# Allegro board tida01606_powercard_0_0.brd
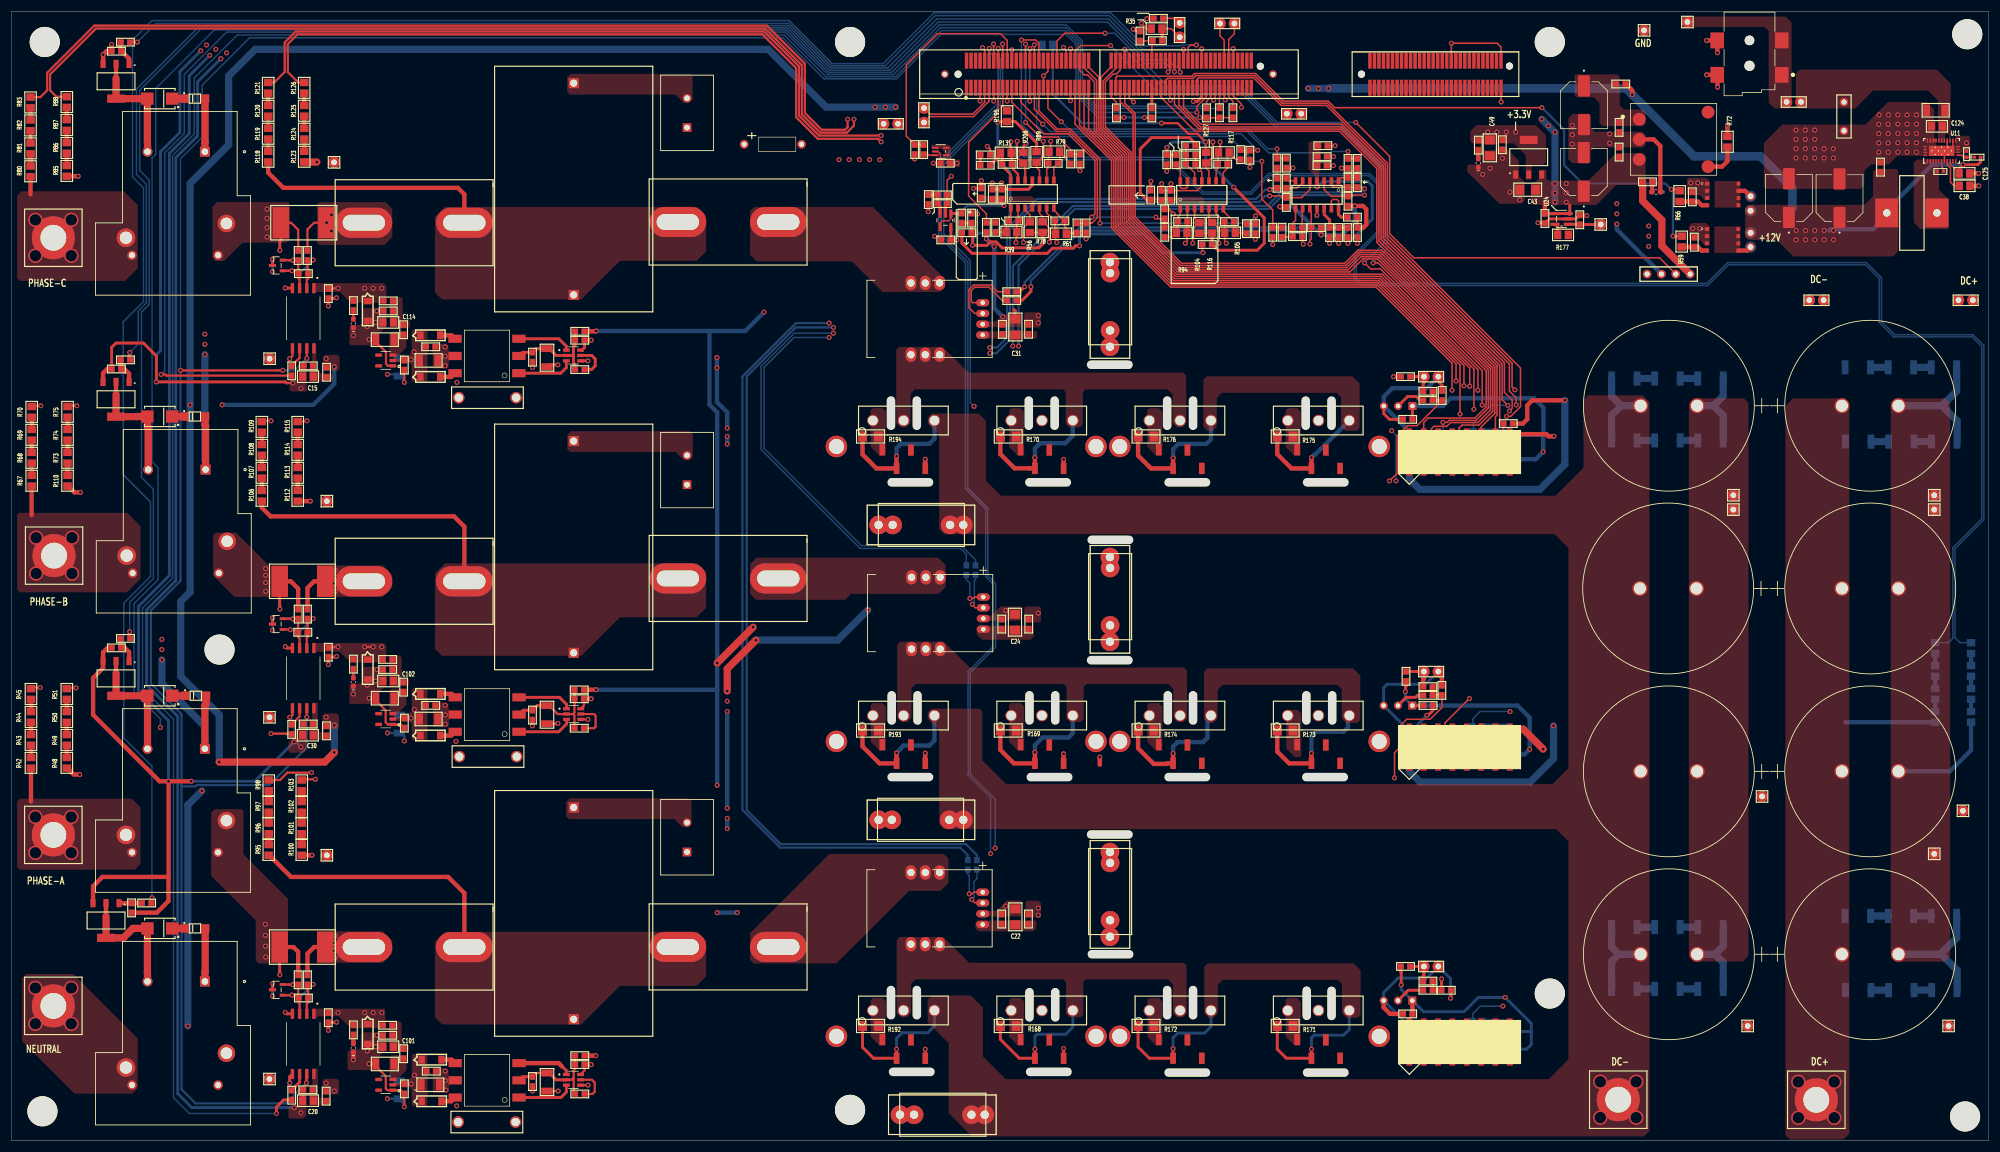
[diagram p0: board, top side]
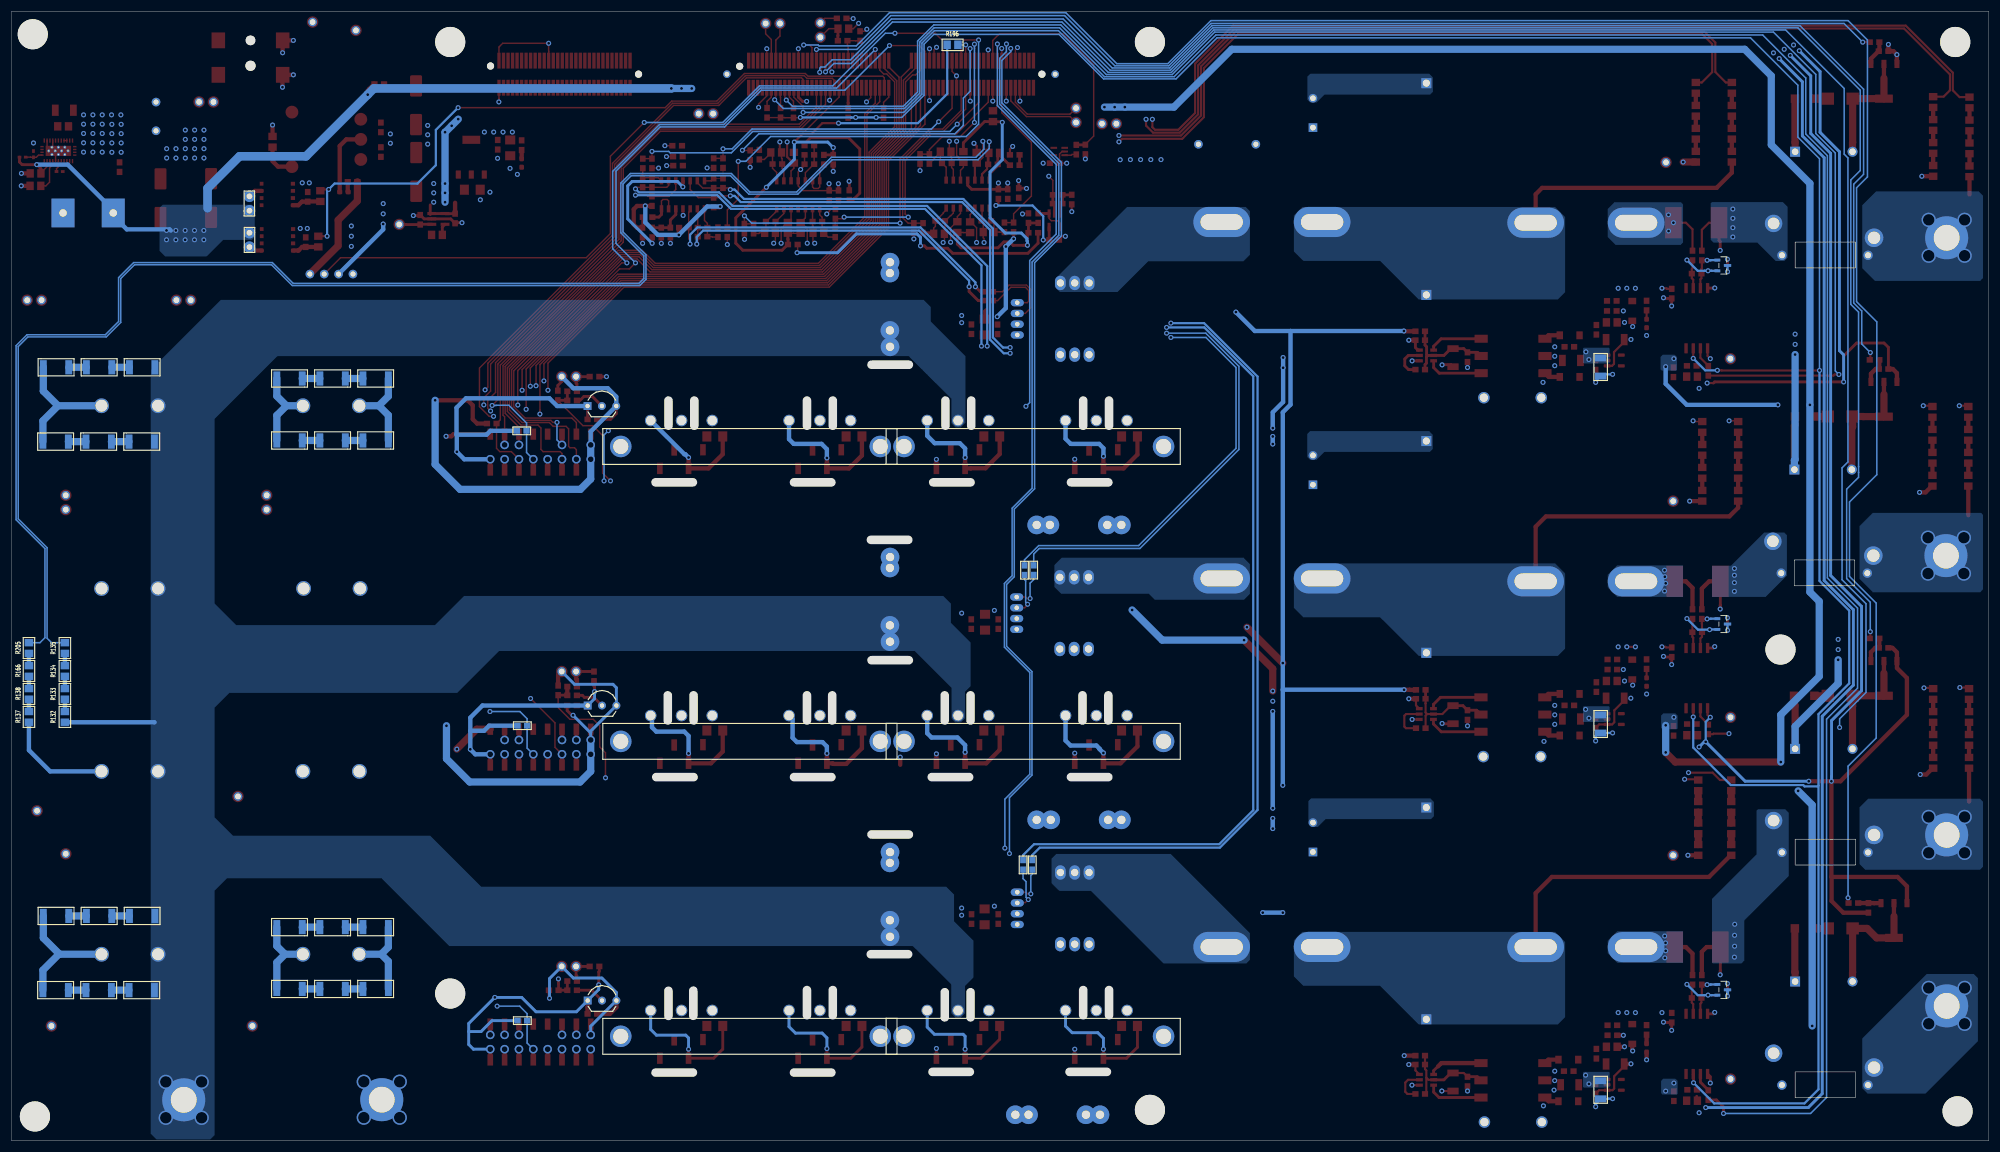
[diagram p1: board, bottom side, seen from below]

Outline 350 x 200 mm; copper layers: TOP, GND LAYER, PWR LAYER, BOTTOM. Coordinates in mm from the lower left corner of the outline.
Outline path: 155.7,131.06 155.7,126.62 ; 155.7,26.67 155.7,22.23 ; 155.83,116.59 162.43,116.59 ; 155.83,78.87 155.83,74.42 ; 155.83,64.39 162.43,64.39 ; 156.08,12.19 162.69,12.19 ; 160.27,131.06 160.27,126.62 ; 160.27,26.67 160.27,22.23 ; 160.4,78.87 160.4,74.42 ; 180.09,131.06 180.09,126.62 ; 180.21,116.59 186.82,116.59 ; 180.21,78.87 180.21,74.42 ; 180.21,26.29 180.21,21.84 ; 180.34,12.19 186.94,12.19 ; 180.47,64.39 187.07,64.39 ; 184.66,131.06 184.66,126.62 ; 184.78,78.87 184.78,74.42 ; 184.78,26.29 184.78,21.84 ; 191.13,137.41 197.74,137.41 ; 191.13,85.09 197.74,85.09 ; 191.13,54.23 197.74,54.23 ; 191.24,106.4 197.84,106.4 ; 191.26,33.02 197.87,33.02 ; 204.6,131.06 204.6,126.62 ; 204.6,26.67 204.6,22.23 ; 204.7,78.87 204.7,74.42 ; 204.85,116.59 211.46,116.59 ; 204.85,64.39 211.46,64.39 ; 204.85,12.06 211.46,12.06 ; 209.17,131.06 209.17,126.62 ; 209.17,78.87 209.17,74.42 ; 209.17,26.67 209.17,22.23 ; 229.11,131.06 229.11,126.62 ; 229.24,78.87 229.24,74.42 ; 229.24,64.39 235.84,64.39 ; 229.29,26.57 229.29,22.12 ; 229.36,116.59 235.97,116.59 ; 229.36,12.06 235.97,12.06 ; 233.68,131.06 233.68,126.62 ; 233.68,26.54 233.68,22.1 ; 233.81,78.87 233.81,74.42 ; 0,200 0,0 350,0 350,200 0,200

## Design rules (mm)
constraint set DEFAULT: min track width 0.127

## Placement (name value [footprint] x y rotation side)
C1  0.15uF 630V TH  [BOXCAPACITOR15MM]  194.46 140.59 180 top
C2  0.15uF 630V TH  [BOXCAPACITOR15MM]  194.46 88.37 180 top
C3  0.15uF 630V TH  [BOXCAPACITOR15MM]  194.46 36.12 180 top
C4  Ele 120uF 600V TH  [CAP_B45_NCH]  324.03 130.15 0 top
C5  Ele 120uF 600V TH  [CAP_B45_NCH]  324.03 33.02 0 top
C6  Ele 120uF 600V TH  [CAP_B45_NCH]  298.39 33.02 180 top
C7  Ele 120uF 600V TH  [CAP_B45_NCH]  298.39 130.15 180 top
C8  10uF TH  [BOXCAP_37_5MM]  99.54 31.5 90 top
C9  10uF TH  [BOXCAP_37_5MM]  99.54 96.4 90 top
C10  10uF TH  [BOXCAP_37_5MM]  99.54 159.77 90 top
C11  0.15uF 630V TH  [BOXCAPACITOR15MM]  157.3 4.6 90 top
C12  0.15uF 630V TH  [BOXCAPACITOR15MM]  153.52 56.82 90 top
C13  0.15uF 630V TH  [BOXCAPACITOR15MM]  153.52 109.04 90 top
C14  0.1uF 0603 25V  [RES0603]  52.56 137.21 180 top
C15  2.2uF 0805 10V  [SNPD0805_MODIFIED]  52.51 135.31 180 top
C16  10u 1210 35V  [1210MODIFIED]  94.82 10.39 270 top
C17  10u 1210 35V  [1210MODIFIED]  94.82 75.44 270 top
C18  0.1uF 0603 25V  [RES0603]  56.11 150 270 top
C19  0.47u 0402 6.3V  [RC0402N]  341.45 171.63 0 top
C20  2.2uF 0805 10V  [SNPD0805_MODIFIED]  52.51 7.09 180 top
C21  0.1uF 0603 25V  [RES0603]  52.49 9.02 180 top
C22  10uF 1206 25V  [SNPD1206_MODIFIED]  177.72 39.65 90 top
C23  0.1uF 0603 25V  [RES0603]  175.31 39.26 90 top
C24  10uF 1206 25V  [SNPD1206_MODIFIED]  177.65 91.82 90 top
C25  0.1uF 0603 25V  [RES0603]  175.31 91.48 90 top
C26  0.1u 0603 50V  [RES0603]  100.62 13.49 0 top
C27  0.1u 0603 50V  [RES0603]  100.52 78.26 0 top
C28  0.1uF 0603 25V  [RES0603]  56.11 21.78 270 top
C29  0.1uF 0603 25V  [RES0603]  52.54 73.79 180 top
C30  2.2uF 0805 10V  [SNPD0805_MODIFIED]  52.49 71.81 180 top
C31  10uF 1206 25V  [SNPD1206_MODIFIED]  177.72 144.09 90 top
C32  0.1uF 0603 25V  [RES0603]  175.44 143.68 90 top
C33  0.1u 0603 50V  [RES0603]  92.25 10.48 270 top
C34  0.1u 0603 50V  [RES0603]  92.25 75.37 270 top
C35  0.1uF 0603  25V  [RES0603]  56.11 86.5 270 top
C36  0.1uF 0603 25V  [RES0603]  232.02 174.27 180 top
C37  1uF 0603 25V  [RES0603]  231.99 172.67 180 top
C38  2.2u 0805 10V  [SNPD0805_MODIFIED]  345.73 169.09 180 top
C39  0.1uF 0603 25V  [RES0603]  253.99 26.65 180 top
C40  0.1uF 0603 25V  [RES0603]  225.68 173.11 90 top
C41  0.1uF 0603 25V  [RES0603]  236.6 173.06 90 top
C42  0.1uF 0603 25V  [RES0603]  253.21 79.74 270 top
C43  10u 1206 25V  [SNPD1206_MODIFIED]  268.4 168.4 180 top
C44  0.1u 0603 25V  [RES0603]  263.91 176.37 90 top
C45  0.1uF 0603 25V  [RES0603]  223.27 160.87 90 top
C46  0.1uF 0603 25V  [RES0603]  199.77 195.62 270 top
C47  0.1uF 0603 25V  [RES0603]  173.63 167.63 270 top
C48  Ele 33u 20V SMD  [CAPAE830X1050N]  314.63 166.93 90 top
C49  10u 1206 25V  [SNPD1206_MODIFIED]  261.7 175.82 270 top
C50  0.1uF 0603 25V  [RES0603]  253.26 131.97 270 top
C51  0.1uF 0603 25V  [RES0603]  172.59 161.73 90 top
C52  0.1uF 0603 25V  [RES0603]  159.89 175.53 90 top
C53  0.1uF 0603 25V  [RES0603]  165.32 173.1 0 top
C54  0.1uF 0603 25V  [RES0603]  190.25 161.63 90 top
C55  0.1uF 0603 25V  [RES0603]  189.15 173.85 90 top
C56  1uF 0603 25V  [RES0603]  175.29 167.63 270 top
C57  0.1uF 0603 25V  [RES0603]  203.58 167.4 270 top
C58  1uF 0603 25V  [RES0603]  205.23 167.4 270 top
C59  0.1uF 0603 25V  [RES0603]  204.14 164.12 270 top
C60  0.1uF 0603 25V  [RES0603]  220.24 161.51 90 top
C61  Ele 100u 50V SMD  [CAPAE830X1050N]  278.36 183.36 270 top
C62  Ele 100u 50V SMD  [CAPAE830X1050N]  278.33 171.56 90 top
C63  0.1uF 0603 25V  [RES0603]  219.23 174.51 90 top
C64  0.1u 0603 50V  [RES0603]  284.58 179.44 90 top
C65  0.1u 1206 50V  [BOXCAPACITOR10MM_SLIM]  79.1 3.3 90 top
C66  0.1u 0603 50V  [RES0603]  284.58 175.07 270 top
C67  0.1u 1206 50V  [BOXCAPACITOR10MM_SLIM]  79.3 68.02 90 top
C68  0.1u 1206 50V  [BOXCAPACITOR10MM_SLIM]  79.2 131.57 90 top
C69  0.1uF 0603 25V  [RES0603]  208.75 172.92 180 top
C70  0.1uF 0603 25V  [RES0603]  204.52 173.72 90 top
C71  0.1uF 0603 25V  [RES0603]  164.8 165.94 180 top
C72  0.1uF 0603 25V  [RES0603]  169.96 163.37 270 top
C73  Ele 120uF 600V TH  [CAP_B45_NCH]  324.03 97.79 0 top
C74  Ele 120uF 600V TH  [CAP_B45_NCH]  324.03 65.41 0 top
C75  Ele 120uF 600V TH  [CAP_B45_NCH]  298.39 65.41 180 top
C76  Ele 120uF 600V TH  [CAP_B45_NCH]  298.26 97.79 180 top
C77  100pF 0603 50V  [RES0603]  236.6 169.68 90 top
C78  82pF 0603 50V  [RES0603]  51.7 25.27 180 top
C79  100pF 0603 50V  [RES0603]  225.68 169.56 90 top
C80  82pF 0603  50V  [RES0603]  51.6 90.04 180 top
C81  100pF 0603 50V  [RES0603]  227.65 161.7 180 top
C82  82pF 0603 50V  [RES0603]  51.7 153.54 180 top
C83  100pF 0603 50V  [RES0603]  177.43 162.89 180 top
C84  100pF 0603 50V  [RES0603]  207.33 162.76 180 top
C85  100pF 0603 50V  [RES0603]  185.58 162.89 0 top
C86  100pF 0603 50V  [RES0603]  215.58 162.76 0 top
C87  100pF 0603 50V  [RES0603]  184.42 173.08 0 top
C88  100pF 0603 50V  [RES0603]  214.41 172.95 0 top
C89  220u 50V 105C TH  [CAP200]  324.38 183.92 270 top
C90  0.1uF 0603 25V  [RES0603]  247.16 22.45 180 top
C91  0.1uF 0603 25V  [RES0603]  250.76 77.06 0 top
C92  0.1uF 0603 25V  [RES0603]  247.16 127.74 180 top
C93  10u 1210 35V  [1210MODIFIED]  74.17 9.91 0 top
C94  0.1u 0603 50V  [RES0603]  74.33 12.32 0 top
C95  10u 1210 35V  [1210MODIFIED]  73.86 74.68 0 top
C96  0.1u 0603 50V  [RES0603]  74.23 77.09 0 top
C97  10u 1210 35V  [1210MODIFIED]  68.68 9.02 270 bottom
C98  10u 1210 35V  [1210MODIFIED]  68.68 73.79 270 bottom
C99  0.1u 0603 50V  [RES0603]  69.57 9.18 270 top
C100  0.1u 0603 50V  [RES0603]  69.57 73.95 270 top
C101  4.7u 0805 50V  [SNPD0805_MODIFIED]  66.72 16.64 180 top
C102  4.7u 0805 50V  [SNPD0805_MODIFIED]  66.72 81.41 180 top
C103  0.1u 0603 50V  [RES0603]  66.61 18.67 180 top
C104  0.1u 0603 50V  [RES0603]  66.61 83.44 180 top
C105  10u 1210 35V  [1210MODIFIED]  66.12 13.59 180 top
C106  10u 1210 35V  [1210MODIFIED]  66.12 78.36 180 top
C107  10u 1210 35V  [1210MODIFIED]  94.82 138.66 270 top
C108  0.1u 0603 50V  [RES0603]  100.62 141.76 0 top
C109  0.1u 0603 50V  [RES0603]  92.25 138.75 270 top
C110  10u 1210 35V  [1210MODIFIED]  73.86 138.18 0 top
C111  0.1u 0603 50V  [RES0603]  74.23 140.59 0 top
C112  10u 1210 35V  [1210MODIFIED]  68.68 137.01 270 bottom
C113  0.1u 0603 50V  [RES0603]  69.57 137.35 270 top
C114  4.7u 0805 50V  [SNPD0805_MODIFIED]  66.72 144.91 180 top
C115  0.1u 0603 50V  [RES0603]  66.71 146.94 180 top
C116  10u 1210 35V  [1210MODIFIED]  66.12 141.86 180 top
C117  1u 0603 25V  [RES0603]  271.45 163.31 90 top
C118  100pF 0603 50V  [RES0603]  277.62 163.08 270 top
C119  0.47u 0603 50V  [RES0603]  330.83 172.4 90 top
C120  0.068uF 630V TH  [BOXCAPACITOR10MM]  194.49 143.49 180 top
C121  0.068uF 630V TH  [BOXCAPACITOR10MM]  194.49 91.26 180 top
C122  0.068uF 630V TH  [BOXCAPACITOR10MM]  194.49 39.04 180 top
C123  4.7u 1210 100V  [1210MODIFIED]  340.61 182.47 0 top
C124  0.047u 0805 100V  [SNPD0805_MODIFIED]  340.83 179.63 0 top
C125  4.7u 0805 50V  [SNPD0805_MODIFIED]  345.7 171.3 0 top
C126  Ele 33u 20V SMD  [CAPAE830X1050N]  323.6 166.91 90 top
C127  0.068uF 630V TH  [BOXCAPACITOR10MM]  156.01 109.04 90 top
C128  0.068uF 630V TH  [BOXCAPACITOR10MM]  159.79 4.6 90 top
C129  0.068uF 630V TH  [BOXCAPACITOR10MM]  155.85 56.82 90 top
C130  2200PF 3KV 20%  [CAP400]  129.72 176.45 270 top
C131  0.1uF 0603 25V  [RES0603]  238.27 160.83 90 top
C132  0.1uF 0603 25V  [RES0603]  233.35 160.83 90 top
C133  100pF 0603 50V  [RES0603]  176.25 172.9 180 top
C134  0.1uF 0603 25V  [RES0603]  172.39 174.57 180 top
C135  0.1uF 0603 25V  [RES0603]  165.41 159.51 180 top
D1  BZV55C15-TP 15V  [DO214_REV3]  32.66 78.79 0 top
D2  BZV55C15-TP 15V  [DO214_REV3]  32.49 128.25 0 top
D3  B160-13-F  [DO214AB]  26.28 78.79 180 top
D4  BZV55C15-TP 15V  [DO214_REV3]  32.49 184.53 0 top
D5  BZV55C15-TP 15V  [DO214_REV3]  32.51 37.59 0 top
D6  B160-13-F  [DO214AB]  26.28 128.25 180 top
D7  B160-13-F  [DO214AB]  26.28 184.53 180 top
D8  B160-13-F  [DO214AB]  26.29 37.59 180 top
D9  B0520LW-7-F 20V  [SOD123]  72.64 6.99 0 top
D11  B0520LW-7-F 20V  [SOD123]  72.42 71.76 0 top
D12  MMBZ27VALT1G  [SOT23_TL431]  47.06 26.72 270 bottom
D13  MMBZ27VALT1G  [SOT23_TL431]  47.06 26.72 90 top
D14  D1G2C1  [SOT23_TL431]  47.06 91.49 270 bottom
D15  D1G2Z1  [SOT23_TL431]  47.06 91.49 90 top
D16  D1G2C1  [SOT23_TL431]  47.06 154.99 270 bottom
D17  D1G2Z1  [SOT23_TL431]  47.06 154.99 90 top
D18  LED GREEN 150060VS55040  [LED0603]  291.12 168 180 top
D19  LED GREEN 150060VS55040  [LED0603]  259.66 173.14 90 top
D24  B0520LW-7-F 20V  [SOD123]  72.64 14.35 0 top
D25  B0520LW-7-F 20V  [SOD123]  72.42 79.12 0 top
D26  LED GREEN 150060VS55040  [LED0603]  60.55 16.45 90 top
D27  LED GREEN 150060VS55040  [LED0603]  60.55 81.22 90 top
D28  MMSZ5232B-7-F 5.6V  [SOD123]  63.09 20.65 270 top
D29  MMSZ5232B-7-F 5.6V  [SOD123]  63.09 85.19 270 top
D30  B0520LW-7-F 20V  [SOD123]  72.42 135.26 0 top
D31  B0520LW-7-F 20V  [SOD123]  72.42 142.62 0 top
D32  LED GREEN 150060VS55040  [LED0603]  60.55 144.72 90 top
D33  MMSZ5232B-7-F 5.6V  [SOD123]  63.09 148.69 270 top
GND_1  TEST POINT  [TESTPOINT]  45.69 10.92 0 top
GND_2  TEST POINT  [TESTPOINT]  45.69 74.98 0 top
GND_3  TEST POINT  [TESTPOINT]  45.72 138.48 0 top
J1  CON2  [CONN_HIGHAMP_REV1]  319.48 9.78 0 top
J2  CON2  [CONN_HIGHAMP_REV1]  284.43 9.8 0 top
J3  CON2  [CONN_HIGHAMP_REV1]  7.44 56.69 0 top
J4  CON2  [CONN_HIGHAMP_REV1]  7.57 106.15 0 top
J5  HSEC8-160-01-L-DV-A-BL  [SAMTEC_HSEC8_160_REV1]  192.68 188.86 0 top
J6  CON2  [SIP_2PIN_BERGSTRIP]  161.54 180.32 180 top
J7  NPTC041KFXC-RC  [NPTC041KFXC-RC_4PIN]  228.85 16.59 0 top
J8  CON2  [SIP_2PIN_BERGSTRIP]  228.32 181.86 270 top
J9  NPTC041KFXC-RC  [NPTC041KFXC-RC_4PIN]  155.42 68.81 0 top
J10  61300211121  [SIP_2PIN_BERGSTRIP]  206.81 195.4 180 top
J11  61300211121  [SIP_2PIN_BERGSTRIP]  213.94 197.84 90 top
J12  NPTC041KFXC-RC  [NPTC041KFXC-RC_4PIN]  155.42 121.03 0 top
J13  HSEC8-130-01-L-DV-A  [HSEC8-130-01-L-DV-A_REV3]  252.08 188.86 180 top
J14  NPTC041KFXC-RC  [NPTC041KFXC-RC_4PIN]  204.37 16.59 0 top
J15  NPTC041KFXC-RC  [NPTC041KFXC-RC_4PIN]  179.91 68.81 0 top
J16  NPTC041KFXC-RC  [NPTC041KFXC-RC_4PIN]  179.91 121.03 0 top
J17  NPTC041KFXC-RC  [NPTC041KFXC-RC_4PIN]  179.91 16.59 0 top
J18  NPTC041KFXC-RC  [NPTC041KFXC-RC_4PIN]  204.37 68.81 0 top
J19  NPTC041KFXC-RC  [NPTC041KFXC-RC_4PIN]  204.37 121.03 0 top
J20  NPTC041KFXC-RC  [NPTC041KFXC-RC_4PIN]  155.42 16.59 0 top
J21  NPTC041KFXC-RC  [NPTC041KFXC-RC_4PIN]  228.85 68.81 0 top
J22  NPTC041KFXC-RC  [NPTC041KFXC-RC_4PIN]  228.85 121.03 0 top
J23  -  [NPTC082KFMS-RC]  247.45 16.21 0 top
J24  -  [NPTC082KFMS-RC]  247.45 68.43 0 top
J25  -  [NPTC082KFMS-RC]  247.45 120.68 0 top
J26  61300211121  [SIP_2PIN_BERGSTRIP#2]  307.85 160.78 180 bottom
J27  CON2  [SIP_2PIN_BERGSTRIP]  252.58 30.86 270 top
J28  61300211121  [SIP_2PIN_BERGSTRIP#2]  307.85 164.69 0 bottom
J29  CON2  [SIP_2PIN_BERGSTRIP]  252.58 83.08 270 top
J30  CON2  [SIP_2PIN_BERGSTRIP]  252.58 135.31 270 top
J31  CON2  [CONN_HIGHAMP_REV1]  7.44 162.43 0 top
J32  CON2  [CONN_HIGHAMP_REV1]  7.44 26.42 0 top
J33  PJ-002AH-SMT-TR  [CUI_PJ-002AH-SMT-TR]  307.36 191.75 270 top
J34  61300211121  [SIP_2PIN_BERGSTRIP]  316.76 183.95 270 top
J35  CON2  [SIP_2PIN_BERGSTRIP]  320.78 148.84 270 top
J36  CON2  [SIP_2PIN_BERGSTRIP]  347.19 148.84 270 top
J37  CON2  [SIP_2PIN_BERGSTRIP]  156.95 180.09 270 top
J38  PPTC041LFBN-RC  [JUMPER4MODIFIED]  297.15 153.47 180 top
J*  -  [unnamed#2]  191.99 18.49 180 bottom
J*#2  -  [unnamed#2]  242.13 18.49 180 bottom
J*#3  -  [unnamed#2]  242.13 70.71 180 bottom
J*#4  -  [unnamed#2]  191.99 122.94 180 bottom
J*#5  -  [unnamed#2]  242.13 122.94 180 bottom
J*#6  -  [unnamed#2]  191.99 70.71 180 bottom
K1  T9AS1D12-15  [RELAY_T9AS1D12-15_REV1]  34.26 69.39 180 top
K2  T9AS1D12-15  [RELAY_T9AS1D12-15_REV1]  34.39 118.85 180 top
K3  T9AS1D12-15  [RELAY_T9AS1D12-15_REV1]  34.26 175.13 180 top
K4  T9AS1D12-15  [RELAY_T9AS1D12-15_REV1]  34.26 28.19 180 top
L1  340uH  [CONN2_HIGHAMP]  123.06 34.32 180 top
L2  0.006E 15A  [CONN2_HIGHAMP]  67.49 34.29 180 top
L3  340uH  [CONN2_HIGHAMP]  123.06 99.57 180 top
L4  0.006E 15A  [CONN2_HIGHAMP]  67.49 99.06 180 top
L5  340uH  [CONN2_HIGHAMP]  123.06 162.69 180 top
L6  0.006E 15A  [CONN2_HIGHAMP]  67.49 162.56 180 top
L7  74279228260  [RES0603]  55.8 136.08 270 top
L8  74279228260  [RES0603]  55.73 7.89 270 top
L9  74279228260  [RES0603]  180.04 39.26 270 top
L10  74279228260  [RES0603]  180.09 91.48 270 top
L11  742792662  [RES0603]  69.44 15.4 90 top
L12  742792662  [RES0603]  69.44 80.33 90 top
L13  74279228260  [RES0603]  55.78 72.58 270 top
L14  74279228260  [RES0603]  180.06 143.7 270 top
L15  742792662  [RES0603]  69.44 143.6 90 top
L16  22uH  [INDUCTOR_SMD_PTH]  340.84 164.29 180 top
L17  74279228260  [RES0603]  232.14 176.2 180 top
L19  74279221111  [RES0603]  284.87 187.12 180 top
L21  74279228260  [RES0603]  171.68 167.83 270 top
L23  74279228260  [RES0603]  201.68 167.45 270 top
NOREF  -  [unnamed]  36.86 86.97 0 top
NOREF#2  -  [unnamed]  148.46 194.56 0 top
NOREF#3  -  [unnamed]  272.31 26.06 0 top
NOREF#4  -  [unnamed]  272.31 194.56 0 top
NOREF#5  -  [unnamed]  346.2 195.94 0 top
NOREF#6  -  [unnamed]  148.46 5.46 0 top
NOREF#7  -  [unnamed]  345.82 4.29 0 top
NOREF#8  -  [unnamed]  5.92 194.56 0 top
NOREF#9  -  [unnamed]  5.51 5.21 0 top
Q1  LSIC1MO120E0080  [TO247AC]  176.99 23.06 180 top
Q2  LSIC1MO120E0080  [TO247AC]  152.5 23.06 180 top
Q3  IKW20N60TFKSA1  [TO247AC]  201.45 23.06 180 top
Q4  IKW20N60TFKSA1  [TO247AC]  225.93 23.06 180 top
Q5  LSIC1MO120E0080  [TO247AC]  176.99 75.29 180 top
Q6  LSIC1MO120E0080  [TO247AC]  152.5 75.29 180 top
Q7  IKW20N60TFKSA1  [TO247AC]  201.45 75.29 180 top
Q8  IKW20N60TFKSA1  [TO247AC]  225.93 75.29 180 top
Q9  LSIC1MO120E0080  [TO247AC]  176.99 127.53 180 top
Q10  LSIC1MO120E0080  [TO247AC]  152.5 127.53 180 top
Q11  IKW20N60TFKSA1  [TO247AC]  201.45 127.53 180 top
Q12  IKW20N60TFKSA1  [TO247AC]  225.93 127.53 180 top
Q13  CSD18534Q5A  [TRANS_CSD18534Q5A]  302.9 159.54 0 top
Q14  CSD18534Q5A  [TRANS_CSD18534Q5A]  302.92 167.56 0 top
Q15  NDT3055L  [SOT223_4]  18.54 81.87 270 top
Q16  NDT3055L  [SOT223_4]  18.54 131.29 270 top
Q17  NDT3055L  [SOT223_4]  18.54 187.61 270 top
Q18  NDT3055L  [SOT223_4]  16.76 38.99 270 top
R1  510K 2010 5%  [RES2010N]  326.84 136.96 180 bottom
R2  510K 2010 5%  [RES2010N]  326.92 123.8 180 bottom
R3  510K 2010 5%  [RES2010N]  334.46 136.96 180 bottom
R4  510K 2010 5%  [RES2010N]  334.54 123.8 180 bottom
R5  0.001E 1052 1%  [RES_PSR400IT]  51.54 34.29 0 top
R6  510K 2010 5%  [RES2010N]  342.08 136.96 180 bottom
R7  510K 2010 5%  [RES2010N]  342.16 123.8 180 bottom
R8  10K 0603 1%  [RES0603]  259.55 73.48 0 bottom
R9  510K 2010 5%  [RES2010N]  300.75 124 0 bottom
R10  510K 2010 5%  [RES2010N]  300.75 134.98 0 bottom
R11  10K 0603 1%  [RES0603]  259.65 125.71 0 bottom
R12  510K 2010 5%  [RES2010N]  293.13 124 0 bottom
R13  510K 2010 5%  [RES2010N]  293.13 134.98 0 bottom
R14  510K 2010 5%  [RES2010N]  285.51 124 0 bottom
R15  510K 2010 5%  [RES2010N]  285.51 134.98 0 bottom
R16  0.68E 5% TH  [RES_SQM7_TYCO]  119.61 51.13 90 top
R17  0.68E 5% TH  [RES_SQM7_TYCO]  119.61 116.15 90 top
R18  0.68E 5% TH  [RES_SQM7_TYCO]  119.61 179.4 90 top
R19  49.9K 0603 1%  [RES0603]  169.3 48.85 270 bottom
R20  49.9K 0603 1%  [RES0603]  170.92 48.84 270 bottom
R21  49.9K 0603 1%  [RES0603]  169.04 101.04 270 bottom
R22  49.9K 0603 1%  [RES0603]  170.66 101.03 270 bottom
R23  49.9K 0603 1%  [RES0603]  177.08 148.77 180 top
R24  49.9K 0603 1%  [RES0603]  177.09 150.34 180 top
R25  100K 0603 1%  [RES0603]  224.03 169.56 270 top
R26  100K 0603 1%  [RES0603]  238.25 169.68 270 top
R27  68.1E 0603 1%  [RES0603]  224.03 173.11 270 top
R28  68.1E 0603 1%  [RES0603]  238.23 173.06 270 top
R29  34.0K 0603 1%  [RES0603]  225.68 166.16 270 top
R30  34.0K 0603 1%  [RES0603]  236.6 166.38 270 top
R31  100K 0603 1%  [RES0603]  227.65 160.1 0 top
R32  10K 0603 1%  [RES0603]  259.55 21.26 0 bottom
R33  34.0K 0603 1%  [RES0603]  230.95 161.7 0 top
R34  0E 0603 0%  [RES0603]  195.61 182 270 top
R35  3.3K 0805 5%  [SNPD0805_MODIFIED]  202.73 196.93 0 top
R36  0E 0603 0%  [RES0603]  201.88 182 270 top
R37  10K 0603 1%  [RES0603]  202.86 194.79 180 top
R38  68.1E 0603 1%  [RES0603]  203.03 198.76 180 top
R39  11K 0805 0.1%  [SNPD0805_MODIFIED]  177.02 160.91 0 top
R40  68.1E 0603 1%  [RES0603]  224.92 160.87 270 top
R41  0.001E 1052 1%  [RES_PSR400IT]  51.54 99.06 0 top
R42  1M 0805 0.1%  [SNPD0805_MODIFIED]  3.48 66.91 270 top
R43  1M 0805 0.1%  [SNPD0805_MODIFIED]  3.48 70.98 270 top
R44  1M 0805 0.1%  [SNPD0805_MODIFIED]  3.48 75.04 270 top
R45  1K 0805 0.1%  [SNPD0805_MODIFIED]  3.48 79.11 270 top
R46  68.1E 0603 1%  [RES0603]  174.22 161.73 270 top
R47  0.001E 1052 1%  [RES_PSR400IT]  51.77 162.56 0 top
R48  1M 0805 0.1%  [SNPD0805_MODIFIED]  9.83 66.91 270 top
R49  1M 0805 0.1%  [SNPD0805_MODIFIED]  9.83 70.98 270 top
R50  1M 0805 0.1%  [SNPD0805_MODIFIED]  9.83 75.04 270 top
R51  1K 0805 0.1%  [SNPD0805_MODIFIED]  9.83 79.11 270 top
R52  10K 0603 1%  [RES0603]  250.74 26.65 180 top
R53  0E 0603 5%  [RES0603]  100.62 15.06 180 top
R54  100K 0402 1%  [RC0402N]  348 174.17 180 top
R55  10K 0603 1%  [RES0603]  246.77 30.86 0 top
R56  11K 0805 0.1%  [SNPD0805_MODIFIED]  180.29 161.76 270 top
R57  9.09K 0402 1%  [RC0402N]  346.07 174.7 90 top
R58  10K 0603 1%  [RES0603]  250.74 28.27 180 top
R59  200E 0805 1%  [SNPD0805_MODIFIED]  295.66 159.22 270 top
R60  10K 0603 1%  [RES0603]  297.89 159.12 90 top
R61  11K 0805 1%  [SNPD0805_MODIFIED]  185.79 160.6 180 top
R62  10K 0603 1%  [RES0603]  250.74 78.87 180 top
R63  0E 0603 5%  [RES0603]  100.52 79.83 180 top
R64  10K 0603 1%  [RES0603]  246.86 82.23 90 top
R65  10K 0603 1%  [RES0603]  250.74 80.42 180 top
R66  200E 0805 1%  [SNPD0805_MODIFIED]  295.3 167.27 270 top
R67  1M 0805 0.1%  [SNPD0805_MODIFIED]  3.61 116.88 270 top
R68  1M 0805 0.1%  [SNPD0805_MODIFIED]  3.61 120.94 270 top
R69  1M 0805 0.1%  [SNPD0805_MODIFIED]  3.61 125 270 top
R70  1K 0805 0.1%  [SNPD0805_MODIFIED]  3.61 129.07 270 top
R71  68.1E 0603 1%  [RES0603]  188.62 161.63 270 top
R72  330E 0805 5%  [SNPD0805_MODIFIED]  303.76 176.9 90 top
R73  1M 0805 0.1%  [SNPD0805_MODIFIED]  9.96 120.94 270 top
R74  1M 0805 0.1%  [SNPD0805_MODIFIED]  9.96 125 270 top
R75  1K 0805 0.1%  [SNPD0805_MODIFIED]  9.96 129.07 270 top
R76  10K 0603 1%  [RES0603]  297.54 167.15 90 top
R77  10K 0603 1%  [RES0603]  250.74 131.09 180 top
R78  11K 0805 0.1%  [SNPD0805_MODIFIED]  182.55 161.79 270 top
R79  11K 0805 0.1%  [SNPD0805_MODIFIED]  184.62 175.13 180 top
R80  1M 0805 0.1%  [SNPD0805_MODIFIED]  3.4 171.66 270 top
R81  1M 0805 0.1%  [SNPD0805_MODIFIED]  3.4 175.73 270 top
R82  1M 0805 0.1%  [SNPD0805_MODIFIED]  3.4 179.79 270 top
R83  1K 0805 0.1%  [SNPD0805_MODIFIED]  3.4 183.86 270 top
R84  68.1E 0603 1%  [RES0603]  187.5 173.85 270 top
R85  1M 0805 0.1%  [SNPD0805_MODIFIED]  9.83 171.74 270 top
R86  1M 0805 0.1%  [SNPD0805_MODIFIED]  9.83 175.8 270 top
R87  1M 0805 0.1%  [SNPD0805_MODIFIED]  9.83 179.87 270 top
R88  1K 0805 0.1%  [SNPD0805_MODIFIED]  9.83 183.93 270 top
R89  11K 0805 0.1%  [SNPD0805_MODIFIED]  181.48 174.2 90 top
R90  0E 0603 5%  [RES0603]  100.62 8.28 0 top
R91  10K 0603 1%  [RES0603]  246.77 135.31 0 top
R92  10K 0603 1%  [RES0603]  250.74 132.72 180 top
R93  10K 0603 1%  [RES0603]  161.49 175.5 270 top
R94  11K 0805 0.1%  [SNPD0805_MODIFIED]  207.15 160.78 0 top
R95  1M 0805 0.1%  [SNPD0805_MODIFIED]  45.57 51.5 270 top
R96  1M 0805 0.1%  [SNPD0805_MODIFIED]  45.57 55.31 270 top
R97  1M 0805 0.1%  [SNPD0805_MODIFIED]  45.57 59.12 270 top
R98  1K 0805 0.1%  [SNPD0805_MODIFIED]  45.57 62.93 270 top
R99  68.1E 0603 1%  [RES0603]  204.17 160.87 270 top
R100  1M 0805 0.1%  [SNPD0805_MODIFIED]  51.41 51.5 270 top
R101  1M 0805 0.1%  [SNPD0805_MODIFIED]  51.41 55.31 270 top
R102  1M 0805 0.1%  [SNPD0805_MODIFIED]  51.41 59.12 270 top
R103  1K 0805 0.1%  [SNPD0805_MODIFIED]  51.41 62.93 270 top
R104  11K 0805 0.1%  [SNPD0805_MODIFIED]  210.29 161.64 270 top
R105  11K 0805 0.1%  [SNPD0805_MODIFIED]  215.71 160.78 180 top
R106  1M 0805 0.1%  [SNPD0805_MODIFIED]  44.35 114.21 270 top
R107  1M 0805 0.1%  [SNPD0805_MODIFIED]  44.35 118.27 270 top
R108  1M 0805 0.1%  [SNPD0805_MODIFIED]  44.35 122.34 270 top
R109  1K 0805 0.1%  [SNPD0805_MODIFIED]  44.35 126.4 270 top
R110  1M 0805 0.1%  [SNPD0805_MODIFIED]  9.96 116.88 270 top
R111  68.1E 0603 1%  [RES0603]  218.62 161.51 270 top
R112  1M 0805 0.1%  [SNPD0805_MODIFIED]  50.7 114.21 270 top
R113  1M 0805 0.1%  [SNPD0805_MODIFIED]  50.7 118.27 270 top
R114  1M 0805 0.1%  [SNPD0805_MODIFIED]  50.7 122.34 270 top
R115  1K 0805 0.1%  [SNPD0805_MODIFIED]  50.7 126.4 270 top
R116  11K 0805 0.1%  [SNPD0805_MODIFIED]  212.55 161.66 270 top
R117  11K 0805 0.1%  [SNPD0805_MODIFIED]  214.61 175.01 180 top
R118  1M 0805 0.1%  [SNPD0805_MODIFIED]  45.47 174.25 270 top
R119  1M 0805 0.1%  [SNPD0805_MODIFIED]  45.47 178.32 270 top
R120  1M 0805 0.1%  [SNPD0805_MODIFIED]  45.47 182.38 270 top
R121  1K 0805 0.1%  [SNPD0805_MODIFIED]  45.47 186.45 270 top
R122  68.1E 0603 1%  [RES0603]  217.6 174.61 270 top
R123  1M 0805 0.1%  [SNPD0805_MODIFIED]  51.84 174.25 270 top
R124  1M 0805 0.1%  [SNPD0805_MODIFIED]  51.84 178.32 270 top
R125  1M 0805 0.1%  [SNPD0805_MODIFIED]  51.84 182.38 270 top
R126  1K 0805 0.1%  [SNPD0805_MODIFIED]  51.84 186.45 270 top
R127  11K 0805 0.1%  [SNPD0805_MODIFIED]  211.48 174.08 90 top
R128  10K 0603 0.1%  [RES0603]  236.57 160.83 90 top
R129  10E 0603 5%  [RES0603]  237.38 163.55 180 top
R130  10K 0603 0.1%  [RES0603]  234.96 160.83 270 top
R131  11K 0805 0.1%  [SNPD0805_MODIFIED]  176.02 174.93 0 top
R132  1M 0805 0.1%  [SNPD0805_MODIFIED]  340.51 75.05 270 bottom
R133  1M 0805 0.1%  [SNPD0805_MODIFIED]  340.51 79.12 270 bottom
R134  1M 0805 0.1%  [SNPD0805_MODIFIED]  340.51 83.18 270 bottom
R135  1K 0805 0.1%  [SNPD0805_MODIFIED]  340.51 87.25 270 bottom
R136  68.1E 0603 1%  [RES0603]  172.39 172.75 0 top
R137  1M 0805 0.1%  [SNPD0805_MODIFIED]  346.88 75.05 270 bottom
R138  1M 0805 0.1%  [SNPD0805_MODIFIED]  346.88 79.12 270 bottom
R139  10K 0603 0.1%  [RES0603]  208.75 176.23 180 top
R140  10E 0603 5%  [RES0603]  206.17 173.72 270 top
R141  10K 0603 0.1%  [RES0603]  208.75 174.57 0 top
R142  10K 0603 0.1%  [RES0603]  162.31 166.66 90 top
R143  10E 0603 5%  [RES0603]  168.24 163.37 90 top
R144  10K 0603 0.1%  [RES0603]  164.8 167.5 0 top
R145  105E 0603 1%  [RES0603]  52.43 28.49 90 top
R146  105E 0603 1%  [RES0603]  49.63 8.07 90 top
R147  105E 0603 1%  [RES0603]  50.77 28.49 90 top
R148  105E 0603  1%  [RES0603]  52.43 93.26 90 top
R149  105E 0603  1%  [RES0603]  49.63 72.84 90 top
R150  105E 0603  1%  [RES0603]  50.77 93.26 90 top
R151  105E 0603 1%  [RES0603]  52.43 156.76 90 top
R152  105E 0603 1%  [RES0603]  49.63 136.34 90 top
R153  105E 0603 1%  [RES0603]  50.77 156.76 90 top
R154  0E 0603 5%  [RES0603]  100.52 73.05 0 top
R155  0E 0603 5%  [RES0603]  66.61 20.45 0 top
R156  820E 0603 1%  [RES0603]  60.55 19.62 90 top
R157  0E 0603 5%  [RES0603]  66.61 85.22 0 top
R158  820E 0603 1%  [RES0603]  60.55 84.39 90 top
R159  0E 0603 5%  [RES0603]  100.62 143.33 180 top
R160  0E 0603 5%  [RES0603]  100.62 136.55 0 top
R161  0E 0603 5%  [RES0603]  66.71 148.72 0 top
R162  820E 0603 1%  [RES0603]  60.55 147.89 90 top
R163  0E 0603 0%  [RES0603]  211.56 182 270 top
R164  0E 0603 0%  [RES0603]  213.84 182.03 270 top
R165  0E 0603 0%  [RES0603]  216.23 182.03 270 top
R166  1M 0805 0.1%  [SNPD0805_MODIFIED]  346.88 83.18 270 bottom
R167  10K 0603 1%  [RES0603]  264.96 127 0 top
R168  10K 1206 5%  [SNPD1206_MODIFIED]  176.46 20.32 0 top
R169  10K 1206 5%  [SNPD1206_MODIFIED]  176.46 72.64 0 top
R170  10K 1206 5%  [SNPD1206_MODIFIED]  176.46 124.71 0 top
R171  10K 1206 5%  [SNPD1206_MODIFIED]  225.48 20.32 180 top
R172  10K 1206 5%  [SNPD1206_MODIFIED]  200.84 20.32 180 top
R173  10K 1206 5%  [SNPD1206_MODIFIED]  225.48 72.64 180 top
R174  10K 1206 5%  [SNPD1206_MODIFIED]  200.84 72.64 180 top
R175  10K 1206 5%  [SNPD1206_MODIFIED]  225.48 124.71 180 top
R176  10K 1206 5%  [SNPD1206_MODIFIED]  200.84 124.71 180 top
R177  0E 0805 5%  [SNPD0805_MODIFIED]  274.66 160.4 180 top
R178  10E 0603 5%  [RES0603]  211.67 158.7 180 top
R179  10E 0603 5%  [RES0603]  169.11 160.78 180 top
R180  510K 2010 5%  [RES2010N]  326.84 39.8 180 bottom
R181  510K 2010 5%  [RES2010N]  326.92 26.67 180 bottom
R182  510K 2010 5%  [RES2010N]  334.46 39.8 180 bottom
R183  510K 2010 5%  [RES2010N]  334.54 26.67 180 bottom
R184  510K 2010 5%  [RES2010N]  342.08 39.8 180 bottom
R185  510K 2010 5%  [RES2010N]  342.16 26.67 180 bottom
R186  510K 2010 5%  [RES2010N]  300.75 37.82 0 bottom
R187  510K 2010 5%  [RES2010N]  300.75 26.87 0 bottom
R188  510K 2010 5%  [RES2010N]  293.13 37.82 0 bottom
R189  510K 2010 5%  [RES2010N]  293.13 26.87 0 bottom
R190  510K 2010 5%  [RES2010N]  285.51 37.82 0 bottom
R191  510K 2010 5%  [RES2010N]  285.51 26.87 0 bottom
R192  0E 1206 1%  [SNPD1206_MODIFIED]  152.07 20.32 0 top
R193  0E 1206 1%  [SNPD1206_MODIFIED]  152.07 72.64 0 top
R194  0E 1206 1%  [SNPD1206_MODIFIED]  152.07 124.71 0 top
R195  0E 0805 5%  [SNPD0805_MODIFIED]  176.25 181.42 270 top
R196  0E 0805 5%  [SNPD0805_MODIFIED]  183.4 194.06 180 bottom
R197  100E 0603 5%  [RES0603]  20.2 88.95 0 top
R198  100E 0603 5%  [RES0603]  20.2 138.28 0 top
R199  100E 0603 5%  [RES0603]  20.2 194.54 0 top
R200  100E 0603 5%  [RES0603]  23.95 42.09 0 top
R201  2K 0603 5%  [RES0603]  18.6 87.27 0 top
R202  2K 0603 5%  [RES0603]  18.6 192.94 0 top
R203  2K 0603 5%  [RES0603]  21.29 41.22 90 top
R204  2K 0603 5%  [RES0603]  18.6 136.65 0 top
R205  1K 0805 0.1%  [SNPD0805_MODIFIED]  346.88 87.25 270 bottom
R206  11K 0805 0.1%  [SNPD0805_MODIFIED]  179.12 174.07 90 top
R207  820E 0603 1%  [RES0603]  289.6 169.8 180 top
R208  820E 0603 1%  [RES0603]  259.66 176.29 90 top
RF1  47  [FUSE600]  36.6 51.05 270 bottom
RF2  47  [FUSE600]  36.72 100.51 270 bottom
RF3  47  [FUSE600]  36.6 156.79 270 bottom
RF4  47  [FUSE600]  36.6 9.86 270 bottom
T1  340uH  [TOROID_SMD_6PIN_1123]  84.21 10.69 180 top
T2  340uH  [TOROID_SMD_6PIN_1123]  84.21 75.46 180 top
T3  340uH  [TOROID_SMD_6PIN_1123]  84.19 138.96 180 top
TP1  TEST POINT  [TESTPOINT]  281.33 162.26 0 top
TP2  TEST POINT  [TESTPOINT]  296.67 198.1 0 top
TP3  TEST POINT  [TESTPOINT]  289 196.62 0 top
TP4  TEST POINT  [TESTPOINT]  307.34 20.32 0 top
TP5  TEST POINT  [TESTPOINT]  342.9 20.32 0 top
TP6  TEST POINT  [TESTPOINT]  309.88 60.96 0 top
TP7  TEST POINT  [TESTPOINT]  340.36 50.8 0 top
TP8  TEST POINT  [TESTPOINT]  345.44 58.42 0 top
TP9  TEST POINT  [TESTPOINT]  304.8 114.3 0 top
TP10  TEST POINT  [TESTPOINT]  304.8 111.76 0 top
TP11  TEST POINT  [TESTPOINT]  340.36 114.3 0 top
TP12  TEST POINT  [TESTPOINT]  340.36 111.76 0 top
TP13  TEST POINT  [TESTPOINT]  55.85 50.55 0 top
TP14  TEST POINT  [TESTPOINT]  55.85 113.26 0 top
TP15  TEST POINT  [TESTPOINT]  57.12 173.25 0 top
U1  AMC1306M05DWVR  [SOIC127P1150X280-8N]  51.66 17.14 270 top
U2  SN6505BDBVR  [SOT95P280X145-6N]  99.5 10.79 0 top
U3  CASR 15-NP  [CASR_LEM]  164.31 34.8 270 top
U4  CASR 15-NP  [CASR_LEM]  164.41 87.07 270 top
U5  AMC1306M05DWVR  [SOIC127P1150X280-8N]  51.66 81.91 270 top
U6  CASR 15-NP  [CASR_LEM]  164.31 139.19 270 top
U7  SN6505BDBVR  [SOT95P280X145-6N]  99.53 75.56 0 top
U8  AMC1306M05DWVR  [SOIC127P1150X280-8N]  51.66 145.65 270 top
U9  OPA4340UA  [SOIC14]  231.11 167.5 270 top
U10  TLV70450DBVR  [SOT95P280X145-5N]  66.28 9.9 180 top
U11  LM76003RNPR  [RNP0030B]  341.67 175.28 90 top
U12  PTH08080WAZT  [VREG_PTH08080WAZT]  294.23 177.32 0 top
U13  LMT87LPM  [TO92100]  247.98 24.82 180 bottom
U14  LMT87LPM  [TO92100]  247.98 77.06 180 bottom
U15  TLV1117LV33DCYR  [SOT223_4]  268.58 174.17 90 top
U16  LMT87LPM  [TO92100]  248.01 130.1 180 bottom
U17  LMT87QDCKRQ1  [DCK5]  164.52 175.17 0 top
U18  OPA4350UA  [SOIC14]  180.72 167.63 90 top
U19  OPA4350UA  [SOIC14]  210.72 167.5 90 top
U20  OPA340NA/250  [DBV5]  165.35 163 270 top
U21  TLV70450DBVR  [SOT95P280X145-5N]  66.28 74.67 180 top
U22  SN6505BDBVR  [SOT95P280X145-6N]  99.5 139.06 0 top
U23  TLV70450DBVR  [SOT95P280X145-5N]  66.28 138.17 180 top
U24  REF2033AIDDCR  [DDC0005A_N]  274.4 163.24 180 top

## Library data of the parts
C1-C3 C8-C15 C18 C20-C25 C28-C32 C35-C37 C39-C42 C45-C47 C50-C60 C63 C69-C72 C77-C88 C90-C92 C117 C118 C120-C122 C127-C135 = CAPACITOR NON-POL: room: pic_pic
C4-C7 C73-C76 = CAPACITOR POL_0: User Part Number: PN; Tolerance: TOL; room: ControlSMPS
C16 C17 C26 C27 C33 C34 C38 C43 C44 C49 C64-C68 C93-C116 C119 C123-C125 = CAP NP: room: control_smps
C19 = CAP NP: User Part Number: PN; Tolerance: TOL; room: control_smps
C48 C61 C62 C89 C126 = CAP: room: 24Vcc3_smps
D1 D2 D4 D5 = DIODE ZENER: room: supplyReg_pic
D3 D6-D8 = DIODE: room: lcd_led_pic
D9 D11 D24 D25 D28-D31 D33 = DIODE ZENER: room: control_smps
D12 D14 D16 = D1G2C1_0
D13 D15 D17 = D1G2Z1
D18 D19 D26 D27 D32 = LED: room: lcd_led_pic
GND_1-GND_3 TP1-TP15 = TEST POINT
J1-J4 J31 J32 = CON2_0
J5 = HEADER 30X2_2
J6 J8 J10 J11 J26-J30 J34-J37 = CON2: room: InputPowe_smps
J7 J9 J12 J14-J22 = HEADER 4_0
J13 = HEADER 30X2_1
J23-J25 = HEADER 8X2_0
J33 = CON2_2: room: InputPowe_smps
J38 = HEADER 4_1
K1-K4 = CON2_3
L1-L6 = INDUCTOR: room: supply_gprs
L7-L15 L17 L19 L21 L23 = VARISTOR_0
L16 = INDUCTOR IRON
Q1 = IRF1010E/TO_4
Q2 = IRF1010E/TO_7
Q3 = IKW25T120_L2_6
Q4 = IKW25T120_L2_5
Q5 = IRF1010E/TO_5
Q6 = IRF1010E/TO_8
Q7 = IKW25T120_L2_8
Q8 = IKW25T120_L2_7
Q9 = IRF1010E/TO_6
Q10 = IRF1010E/TO_9
Q11 = IKW25T120_L2_10
Q12 = IKW25T120_L2_9
Q13 Q14 = CSD18534Q5A
Q15-Q18 = IRF1010E/TO_1
R1-R4 R6 R7 R9 R10 R12-R15 R17 R18 R41 R47 R180-R191 = RESISTOR: User Part Number: PN; Tolerance: TOL; room: pic_pic
R5 = RESISTOR: User Part Number: PN; room: pic_pic
R8 R11 R16 R19-R40 R42-R46 R48-R52 R55 R56 R58 R61 R62 R64 R65 R67-R71 R73-R75 R77-R89 R91-R153 R163-R176 R178 R179 R192-R195 R197-R206 = RESISTOR: room: pic_pic
R53 R59 R60 R63 R66 R72 R76 R90 R154-R162 R177 R196 R207 R208 = RESISTOR: room: control_smps
R54 R57 = RESISTOR: User Part Number: PN; Tolerance: TOL; room: control_smps
RF1-RF4 = FUSE: Tolerance: ***; User Part Number: ***
T1-T3 = TRANSFORMER STEPUP_0
U1 U5 U8 = socket8_0: room: 3
U2 U7 U22 = DM3AT-SF-PEJM5_1
U3 = socket8_6: User Part Number: PN; Tolerance: TOL; room: 3
U4 = socket8_7: User Part Number: PN; Tolerance: TOL; room: 3
U6 = socket8_8: User Part Number: PN; Tolerance: TOL; room: 3
U9 U18 U19 = OPA4340_8
U10 U15 U21 U23 = DM3AT-SF-PEJM5_2
U11 = DM3AT-SF-PEJM5_6: User Part Number: PN; Tolerance: TOL
U12 = DM3AT-SF-PEJM5_3
U13 U14 U16 = socket8_2: room: 3
U17 = socket8_9: User Part Number: PN; Tolerance: TOL; room: 3
U20 = OPA340_0: User Part Number: PN; Tolerance: TOL
U24 = DM3AT-SF-PEJM5_5: User Part Number: PN; Tolerance: TOL

## Footprints (pads in the part's own frame, mm; a bottom-side part is the same pattern mirrored in y, then rotated)
1210MODIFIED
  rect 1.2x2 smd: 1(-1.6,0) 2(1.6,0)
BOXCAP_37_5MM
  rect 1.778x1.778 hole 1.27: 1(-10,0) 2(27.5,0)
BOXCAPACITOR10MM
  round 3.302 hole 1.473: 1(0,0) 2(0,-10.16)
BOXCAPACITOR10MM_SLIM
  round 2.032 hole 1.473: 1(0,0) 2(0,-10.16)
BOXCAPACITOR15MM
  round 3.302 hole 1.473: 1(0,0) 2(0,-14.986)
CAP200
  round 1.524 hole 0.914: 1(0,0) 2(5.08,0)
CAP400
  round 1.524 hole 0.914: 1(0,0) 2(0,10.16)
CAP_B45_NCH
  round 2.616 hole 2.108: 1(0,0) 2(10,0)
CAPAE830X1050N
  custom 3.77x2.12 smd: 1(-3.425,0) 2(3.425,0)
CASR_LEM
  oval 2.54x1.905 hole 1.295: 1(0,0) 2(0,-2.54) 3(0,-5.08) 8(-12.7,-5.08) 9(-12.7,-2.54) 10(-12.7,0)
  oval 1.295x2.311 hole 0.813: 11(-9.207,7.63) 12(-7.303,7.63) 13(-5.397,7.63) 14(-3.493,7.63)
CONN2_HIGHAMP
  oval 10.033x5.334 hole 7.493x2.794: 1(-12.7,0) 2(5.08,0)
CONN_HIGHAMP_REV1
  round 7.62 hole 4.572: 1(0,-2.54)
CUI_PJ-002AH-SMT-TR
  round 1.7 hole 1.7 unplated: (-3.1,0.3)
  round 1.8 hole 1.8 unplated: (1.4,0.3)
  rect 2.8x2.4 smd: 1(3,6) 1A(-3.1,6) 2(-3.1,-5.4) 3(3,-5.4)
DBV5
  rect 1.473x0.559 smd: 1(-1.194,0.95) 2(-1.194,0) 3(-1.194,-0.95) 4(1.194,-0.95) 5(1.194,0.95)
DCK5
  rect 1.168x0.356 smd: 1(-0.965,0.65) 2(-0.965,0) 3(-0.965,-0.65) 4(0.965,-0.65) 5(0.965,0.65)
DDC0005A_N
  rect 1.575x0.559 smd: 1(-1.168,0.95) 2(-1.168,0) 3(-1.168,-0.95) 4(1.168,-0.95) 5(1.168,0.95)
DO214_REV3
  rect 1.5x1.5 smd: 1(-1.8,0) 2(1.8,0)
DO214AB
  rect 2.2x2.15 smd: 1(-2.2,0) 2(2.2,0)
FUSE600
  round 1.651 hole 1.067: 1(0,0) 2(0,15.24)
HSEC8-130-01-L-DV-A_REV3
  round 1.27 hole 1.27 unplated: (-13.101,-1.44) (13.1,0)
  rect 0.6x2.82 smd: 121(11.601,2.4) 122(11.601,-2.4) 123(10.801,2.4) 124(10.801,-2.4) 125(10.001,2.4) 126(10.001,-2.4) 127(9.201,2.4) 128(9.201,-2.4) 129(8.401,2.4) 130(8.401,-2.4) 131(7.601,2.4) 132(7.601,-2.4) 133(6.801,2.4) 134(6.801,-2.4) 135(6.001,2.4) 136(6.001,-2.4) 137(5.201,2.4) 138(5.201,-2.4) 139(4.401,2.4) 140(4.401,-2.4) 141(3.6,2.4) 142(3.6,-2.4) 143(2.8,2.4) 144(2.8,-2.4) 145(2,2.4) 146(2,-2.4) 147(1.2,2.4) 148(1.2,-2.4) 149(0.4,2.4) 150(0.4,-2.4) 151(-0.4,2.4) 152(-0.4,-2.4) 153(-1.2,2.4) 154(-1.2,-2.4) 155(-2,2.4) 156(-2,-2.4) 157(-2.8,2.4) 158(-2.8,-2.4) 159(-3.6,2.4) 160(-3.6,-2.4) 161(-4.401,2.4) 162(-4.401,-2.4) 163(-5.201,2.4) 164(-5.201,-2.4) 165(-6.001,2.4) 166(-6.001,-2.4) 167(-6.801,2.4) 168(-6.801,-2.4) 169(-7.601,2.4) 170(-7.601,-2.4) 171(-8.401,2.4) 172(-8.401,-2.4) 173(-9.201,2.4) 174(-9.201,-2.4) 175(-10.001,2.4) 176(-10.001,-2.4) 177(-10.801,2.4) 178(-10.801,-2.4) 179(-11.601,2.4) 180(-11.601,-2.4)
INDUCTOR_SMD_PTH
  rect 4.064x5.08 hole 1.321: 1(0,0) 2(8.89,0)
JUMPER4MODIFIED
  round 1.524 hole 0.914: 1(0,0) 2(2.54,0) 3(5.08,0) 4(7.62,0)
LED0603
  custom 0.91x0.83 smd: 1(-0.75,0) 2(0.75,0)
NPTC041KFXC-RC_4PIN
  rect 1x2 smd: 1(-1.27,1.321) 2(1.27,-1.981) 3(3.81,1.27) 4(6.35,-1.981)
NPTC082KFMS-RC
  rect 1x2 smd: 1(0,4.445) 2(0,-1.905) 3(2.54,4.445) 4(2.54,-1.905) 5(5.08,4.445) 6(5.08,-1.905) 7(7.62,4.445) 8(7.62,-1.905) 9(10.16,4.445) 10(10.16,-1.905) 11(12.7,4.445) 12(12.7,-1.905) 13(15.24,4.445) 14(15.24,-1.905) 15(17.78,4.445) 16(17.78,-1.905)
RC0402N
  rect 0.656x0.5 smd: 1(-0.553,0) 2(0.553,0)
RELAY_T9AS1D12-15_REV1
  round 3.09 hole 2.06: 1(-3.81,12.7)
  round 3.29 hole 2.19: 2(13.97,15.24)
  rect 1.76x1.76 hole 1.17: 3(0,0)
  round 1.76 hole 1.17: 4(10.16,0)
RES0603
  rect 1.1x1 smd: 1(-0.85,0) 2(0.85,0)
RES2010N
  rect 1.206x2.5 smd: 1(-2.253,0) 2(2.253,0)
RES_PSR400IT
  rect 2.946x5.512 smd: 1(-4.039,0) 2(4.039,0)
RES_SQM7_TYCO
  rect 1.524x1.524 hole 1.016: 1(0,0)
  round 1.524 hole 1.016: 2(5.207,0)
RNP0030B
  rect 0.75x0.25 smd: 1(-1.825,2.5) 2(-1.825,2) 3(-1.825,1.5) 4(-1.825,1) 5(-1.825,0.5) 6(-1.825,0) 7(-1.825,-0.5) 8(-1.825,-1) 9(-1.825,-1.5) 10(-1.825,-2) 11(-1.825,-2.5) 16(1.825,-2.5) 17(1.825,-2) 18(1.825,-1.5) 19(1.825,-1) 20(1.825,-0.5) 21(1.825,0) 22(1.825,0.5) 23(1.825,1) 24(1.825,1.5) 25(1.825,2) 26(1.825,2.5)
  rect 0.25x0.6 smd: 12(-0.75,-2.9) 13(-0.25,-2.9) 14(0.25,-2.9) 15(0.75,-2.9) 27(0.75,2.9) 28(0.25,2.9) 29(-0.25,2.9) 30(-0.75,2.9)
  rect 1.8x4.5 smd: 31(0,0)
  round 0.5 hole 0.203: 32(-0.65,0) 33(0.65,0) 34(0.65,1.14) 35(-0.65,1.14) 36(0,1.71) 37(0,0.57) 38(0,-0.57) 39(0,-1.71) 40(-0.65,-1.14) 41(0.65,-1.14)
SAMTEC_HSEC8_160_REV1
  round 1.27 hole 1.27 unplated: (-25.1,0) (28.4,1.4)
  rect 0.6x2.82 smd: 1(-23.6,-2.4) 2(-23.6,2.4) 3(-22.8,-2.4) 4(-22.8,2.4) 5(-22,-2.4) 6(-22,2.4) 7(-21.2,-2.4) 8(-21.2,2.4) 9(-20.4,-2.4) 10(-20.4,2.4) 11(-19.6,-2.4) 12(-19.6,2.4) 13(-18.8,-2.4) 14(-18.8,2.4) 15(-18,-2.4) 16(-18,2.4) 17(-17.2,-2.4) 18(-17.2,2.4) 19(-16.4,-2.4) 20(-16.4,2.4) 21(-15.6,-2.4) 22(-15.6,2.4) 23(-14.8,-2.4) 24(-14.8,2.4) 25(-14,-2.4) 26(-14,2.4) 27(-13.2,-2.4) 28(-13.2,2.4) 29(-12.4,-2.4) 30(-12.4,2.4) 31(-11.6,-2.4) 32(-11.6,2.4) 33(-10.8,-2.4) 34(-10.8,2.4) 35(-10,-2.4) 36(-10,2.4) 37(-9.2,-2.4) 38(-9.2,2.4) 39(-8.4,-2.4) 40(-8.4,2.4) 41(-7.6,-2.4) 42(-7.6,2.4) 43(-6.8,-2.4) 44(-6.8,2.4) 45(-6,-2.4) 46(-6,2.4) 47(-5.2,-2.4) 48(-5.2,2.4) 49(-4.4,-2.4) 50(-4.4,2.4) 51(-3.6,-2.4) 52(-3.6,2.4) 53(-2.8,-2.4) 54(-2.8,2.4) 55(-2,-2.4) 56(-2,2.4) 57(2,-2.4) 58(2,2.4) 59(2.8,-2.4) 60(2.8,2.4) 61(3.6,-2.4) 62(3.6,2.4) 63(4.4,-2.4) 64(4.4,2.4) 65(5.2,-2.4) 66(5.2,2.4) 67(6,-2.4) 68(6,2.4) 69(6.8,-2.4) 70(6.8,2.4) 71(7.6,-2.4) 72(7.6,2.4) 73(8.4,-2.4) 74(8.4,2.4) 75(9.2,-2.4) 76(9.2,2.4) 77(10,-2.4) 78(10,2.4) 79(10.8,-2.4) 80(10.8,2.4) 81(11.6,-2.4) 82(11.6,2.4) 83(12.4,-2.4) 84(12.4,2.4) 85(13.2,-2.4) 86(13.2,2.4) 87(14,-2.4) 88(14,2.4) 89(14.8,-2.4) 90(14.8,2.4) 91(15.6,-2.4) 92(15.6,2.4) 93(16.4,-2.4) 94(16.4,2.4) 95(17.2,-2.4) 96(17.2,2.4) 97(18,-2.4) 98(18,2.4) 99(18.8,-2.4) 100(18.8,2.4) 101(19.6,-2.4) 102(19.6,2.4) 103(20.4,-2.4) 104(20.4,2.4) 105(21.2,-2.4) 106(21.2,2.4) 107(22,-2.4) 108(22,2.4) 109(22.8,-2.4) 110(22.8,2.4) 111(23.6,-2.4) 112(23.6,2.4) 113(24.4,-2.4) 114(24.4,2.4) 115(25.2,-2.4) 116(25.2,2.4) 117(26,-2.4) 118(26,2.4) 119(26.8,-2.4) 120(26.8,2.4)
  round 1.348 hole 0.84: P1(-27.45,0) P2(30.65,0)
SIP_2PIN_BERGSTRIP
  round 2.032 hole 1.016: 1(0,0) 2(0,-2.54)
SIP_2PIN_BERGSTRIP#2
  round 1.524 hole 1.016: 1(0,0) 2(0,-2.54)
SNPD0805_MODIFIED
  rect 1.3x1.5 smd: 1(-0.95,0) 2(0.95,0)
SNPD1206_MODIFIED
  rect 1.6x1.8 smd: 1(-1.4,0) 2(1.4,0)
SOD123
  rect 1.143x1.397 smd: 1(0,0) 2(3.505,0)
SOIC14
  rect 1.27x0.635 smd: 1(-2.477,3.81) 2(-2.477,2.54) 3(-2.477,1.27) 4(-2.477,0) 5(-2.477,-1.27) 6(-2.477,-2.54) 7(-2.477,-3.81) 8(2.477,-3.81) 9(2.477,-2.54) 10(2.477,-1.27) 11(2.477,0) 12(2.477,1.27) 13(2.477,2.54) 14(2.477,3.81)
SOIC127P1150X280-8N
  custom 1.8x0.6 smd: 1(-5.33,1.905) 2(-5.33,0.635) 3(-5.33,-0.635) 4(-5.33,-1.905) 5(5.33,-1.905) 6(5.33,-0.635) 7(5.33,0.635) 8(5.33,1.905)
SOT23_TL431
  rect 0.508x1.016 smd: 1(-0.95,-0.965) 2(0.95,-0.965)
  rect 0.508x1.283 smd: 3(0,0.832)
SOT95P280X145-5N
  custom 1.21x0.59 smd: 1(-1.255,0.95) 2(-1.255,0) 3(-1.255,-0.95) 4(1.255,-0.95) 5(1.255,0.95)
SOT95P280X145-6N
  rect 1.21x0.58 smd: 1(-1.255,0.95) 2(-1.255,0) 3(-1.255,-0.95) 4(1.255,-0.95) 5(1.255,0) 6(1.255,0.95)
SOT223_4
  rect 1.45x0.9 smd: 1(-3.075,2.3) 2(-3.075,0) 3(-3.075,-2.3)
  rect 1.45x3.15 smd: 4(3.075,0)
TESTPOINT
  round 2.032 hole 1.016: 1(0,0)
TO247AC
  round 2.032 hole 1.676: 1(0,0) 2(-5.436,0) 3(-10.897,0)
TO92100
  rect 1.397x1.397 hole 0.787: 1(0,0)
  round 1.397 hole 0.787: 2(2.54,0) 3(5.08,0)
TOROID_SMD_6PIN_1123
  rect 2.337x1.422 smd: 1(-5.652,3.048) 2(-5.652,0) 3(-5.652,-3.048) 4(5.652,-3.048) 5(5.652,0) 6(5.652,3.048)
TRANS_CSD18534Q5A
  rect 0.75x0.68 smd: 1(-2.77,1.905) 2(-2.77,0.635) 3(-2.77,-0.635) 4(-2.77,-1.905)
  rect 0.66x0.68 smd: 5(2.78,-1.905) 6(2.78,-0.635) 7(2.78,0.635) 8(2.78,1.905)
unnamed
  round 5.588 hole 5.334 unplated: (0,0)
unnamed#2
  round 3.81 hole 2.667: 1(0,0) 2(45.939,0)
VREG_PTH08080WAZT
  custom 2.26x2.26 smd: 1(-6.095,3.56) 2(-6.095,0) 3(-6.095,-3.56) 4(6.095,-4.825) 5(6.095,4.825)

## Nets
1.65V_U9: C131.2 R29.2 R30.2 R33.2 R129.1
1.65V_U18: C72.2 R56.2 R78.2 R89.2 R143.1 R179.1 R195.2
1.65V_U19: C70.2 R104.2 R116.2 R127.2 R140.1 R178.1 R196.1
3.3V: C44.2 C49.1 C53.2 C90.1 C91.1 C92.1 J23.16 J24.16 J25.16 J38.3 L7.1 L8.1 L13.1 L17.1 L21.1 L23.1 R8.2 R11.2 R32.2 R35.1 R55.1 R64.1 R91.1 R208.2 U13.1(VDD) U14.1(VDD) U15.2 U15.4(OUT2) U16.1(VDD) U17.1 U17.4 U17.5(VDD3)
3.3V_U9: C36.2 C37.2 L17.2 R128.1 U9.4
3.3V_U18: C47.2 C56.2 C135.1 L21.2 R142.1 U18.4 U20.5
3.3V_U19: C57.2 C58.2 L23.2 R139.1 U19.4
5V: C43.1 C62.1 C66.2 C117.2 J5.48 J5.84 J5.98 J5.112 J13.158 J13.180 J38.1 L9.1 L10.1 L14.1 R53.1 R63.1 R159.1 R207.2 U12.3 U15.3 U24.3 U24.4
5V_1: C28.1 D12.3 D28.1(CATHODE) R155.1 R156.2 U1.1
5V_2: C35.1 D14.3 D29.1(CATHODE) R157.1 R158.2 U5.1
5V_3: C18.1 D16.3 D33.1(CATHODE) R161.1 R162.2 U8.1
15V: J33.1 J33.1A J34.2 TP2.1
+6V_VDC_1: C93.1 C94.1 C97.1 C99.1 D9.1(CATHODE) D24.1(CATHODE) U10.2
+6V_VDC_2: C95.1 C96.1 C98.1 C100.1 D11.1(CATHODE) D25.1(CATHODE) U21.2
+6V_VDC_3: C110.1 C111.1 C112.1 C113.1 D30.1(CATHODE) D31.1(CATHODE) U23.2
+12V: C48.1 C119.1 C125.1 C126.1 D1.2 D2.2 D4.2 D5.2 J23.15 J24.15 J25.15 J26.1 J28.1 K1.3 K2.3 K3.3 K4.3 L16.2 L19.1 R54.1 U11.9
+15V: C89.1 C123.2 C124.2 J34.1 U11.18 U11.20 U11.21 U11.22
GND: C14.2 C15.2 C16.2 C17.2 C20.2 C21.2 C22.2 C23.2 C24.2 C25.2 C26.2 C27.2 C29.2 C30.2 C31.2 C32.2 C33.2 C34.2 C36.1 C37.1 C38.1 C39.1 C40.1 C41.1 C42.1 C43.2 C44.1 C45.1 C46.1 C47.1 C48.2 C49.2 C50.1 C51.1 C52.1 C53.1 C54.1 C55.1 C56.1 C57.1 C58.1 C59.1 C60.1 C61.2 C62.2 C63.1 C64.1 C65.2 C66.1 C67.2 C68.2 C69.1 C70.1 C71.1 C72.1 C89.2 C90.2 C91.2 C92.2 C107.2 C108.2 C109.2 C117.1 C118.1 C119.2 C123.1 C124.1 C125.2 C126.2 C130.2 C131.1 C132.1 C134.1 C135.2 D18.1(CATHODE) D19.1(CATHODE) GND_1.1 GND_2.1 GND_3.1 J5.7 J5.10 J5.13 J5.16 J5.19 J5.22 J5.29 J5.35 J5.38 J5.46 J5.47 J5.65 J5.83 J5.97 J5.111 J8.1 J8.2 J13.179 J23.1 J23.2 J24.1 J24.2 J25.1 J25.2 J27.1 J29.1 J30.1 J33.2 J33.3 J37.1 J37.2 J38.4 Q13.1 Q13.2 Q13.3 Q14.1 Q14.2 Q14.3 Q15.3(S) Q16.3(S) Q17.3(S) Q18.3(S) R38.2 R57.2 R60.2 R72.2 R76.2 R130.2 R141.2 R144.2 R167.2 R201.1 R202.1 R203.1 R204.1 R206.2 TP3.1 U1.5 U2.4 U2.6 U3.13 U4.13 U5.5 U6.13 U7.4 U7.6 U8.5 U9.11 U11.7 U11.13 U11.14 U11.15 U11.16 U11.17 U11.19 U11.23 U11.24 U11.25 U11.26 U11.27 U11.28 U11.29 U11.30 U11.31 U11.32 U11.33 U11.34 U11.35 U11.36 U11.37 U11.38 U11.39 U11.40 U11.41 U12.2 U13.3 U14.3 U15.1 U16.3 U17.2 U18.11 U19.11 U20.2 U22.4 U22.6 U24.2
PGND: C1.2 C2.2 C3.2 C4.2 C5.2 C6.1 C7.1 C11.1 C12.1 C13.1 C73.2 C74.2 C75.1 C76.1 C120.2 C121.2 C122.2 C127.1 C128.1 C129.1 C130.1 K4.1 Q4.2 Q8.2 Q12.2 R6.1 R7.1 R9.2 R10.2 R16.1 R17.1 R18.1 R100.2 R112.2 R123.2 R137.2 R184.1 R185.1 R186.2 R187.2 RF4.1 TP4.1 TP5.1 TP6.1 TP7.1 TP8.1 TP9.1 TP10.1 TP11.1 TP12.1 TP13.1 TP14.1 TP15.1
V1.65: C118.2 R178.2 R179.2 TP1.1 U24.1
VINV_A: C28.2 C65.1 C93.2 C94.2 C97.2 C99.2 C101.2 C103.2 C105.2 D13.3 D26.1(CATHODE) D28.2 K1.1 R5.1 R147.2 RF1.1 T1.5(NC2) U1.4 U10.1
VINV_B: C35.2 C67.1 C95.2 C96.2 C98.2 C100.2 C102.2 C104.2 C106.2 D15.3 D27.1(CATHODE) D29.2 K2.1 R41.1 R150.2 RF2.1 T2.5(NC2) U5.4 U21.1
VINV_C: C18.2 C68.1 C110.2 C111.2 C112.2 C113.2 C114.2 C115.2 C116.2 D17.3 D32.1(CATHODE) D33.2 K3.1 R47.1 R153.2 RF3.1 T3.5(NC2) U8.4 U23.1
VINV_SEN_A: C59.2 J5.21 R99.1
VINV_SEN_B: C60.2 J5.33 R111.1
VINV_SEN_C: C63.2 J5.30 R122.1
DC+: C1.1 C2.1 C3.1 C4.1 C5.1 C73.1 C74.1 C120.1 C121.1 C122.1 J1.1 J15.4 J16.4 J17.4 J36.1 J36.2 Q1.2 Q5.2 Q9.2 R1.2 R2.2 R132.2 R180.2 R181.2
DC-: C6.2 C7.2 C11.2 C12.2 C13.2 C75.2 C76.2 C127.2 C128.2 C129.2 J2.1 J9.2 J12.2 J20.2 J35.1 J35.2 Q2.3(S) Q6.3(S) Q10.3(S) R14.1 R15.1 R190.1 R191.1 R192.1 R193.1 R194.1
FAN_CNTL: J5.59 R59.1 R66.1
FLT_A: J5.89 J23.10 R32.1
FLT_B: J5.87 J24.10 R8.1
FLT_C: J5.85 J25.10 R11.1
HI_PWM: J5.63 J23.13 J24.13 J25.13
IGRID_A: L2.2 R5.2 R145.2
IGRID_B: L4.2 R41.2 R148.2
IGRID_C: L6.2 R47.2 R151.2
IIND_A: J17.2 J20.4 Q1.3(S) Q2.2 Q3.2 R168.1 U3.1 U3.2 U3.3
IIND_A_RTN: L1.1 U3.8 U3.9 U3.10
IIND_B: J9.4 J15.2 Q5.3(S) Q6.2 Q7.2 R169.1 U4.1 U4.2 U4.3
IIND_B_RTN: L3.1 U4.8 U4.9 U4.10
IIND_C: J12.4 J16.2 Q9.3(S) Q10.2 Q11.2 R170.1 U6.1 U6.2 U6.3
IIND_C_RTN: L5.1 U6.8 U6.9 U6.10
ILA_FDBK: C41.2 J5.25 R28.1
ILA_N: C77.1 R19.1 R26.2 U9.2
ILA_P: R20.1 R30.1 U9.3
ILB_FDBK: C40.2 J5.37 R27.1
ILB_N: C79.1 R21.1 R25.2 U9.6
ILB_P: R22.1 R29.1 U9.5
ILC_FDBK: C45.2 J5.34 R40.1
ILC_N: C81.1 R23.1 R31.2 U9.9
ILC_P: R24.1 R33.1 U9.10
LI_PWM: J5.61 J23.11 J24.11 J25.11
NEU: J32.1 K4.2 R48.2 R85.2 R110.2 RF4.2
PA_N: C83.1 R39.2 R45.1 U18.2
PA_P: R51.1 R56.1 U18.3
PB_N: C85.1 R61.2 R70.1 U18.6
PB_P: R75.1 R78.1 U18.5
PC_N: C87.1 R79.2 R83.1 U18.9
PC_P: R88.1 R89.1 U18.10
PD_N: C133.1 R131.2 R135.1 U18.13
PD_P: R205.1 R206.1 U18.12
PH_A: J3.1 K1.2 R42.2 RF1.2
PH_B: J4.1 K2.2 R67.2 RF2.2
PH_C: J31.1 K3.2 R80.2 RF3.2
PWM_EN: J5.95 J23.8 J24.8 J25.8
PWM_Q1A: J5.49 J23.5
PWM_Q1B: J5.50 J24.5
PWM_Q1C: J5.58 J25.5
PWM_Q2A: J5.53 J23.6
PWM_Q2B: J5.54 J24.6
PWM_Q2C: J5.62 J25.6
PWM_Q3A: J5.51 J23.4
PWM_Q3B: J5.52 J24.4
PWM_Q3C: J5.60 J25.4
PWM_Q4A: J5.55 J23.3
PWM_Q4B: J5.56 J24.3
PWM_Q4C: J5.64 J25.3
Q1A: J17.1 Q1.1 R168.2
Q1B: J15.1 Q5.1 R169.2
Q1C: J16.1 Q9.1 R170.2
Q2A: J20.1 Q2.1 R192.2
Q2B: J9.1 Q6.1 R193.2
Q2C: J12.1 Q10.1 R194.2
Q3A: J14.1 Q3.1(GATE) R172.1
Q3B: J18.1 Q7.1(GATE) R174.1
Q3C: J19.1 Q11.1(GATE) R176.1
Q4A: J7.1 Q4.1(GATE) R171.1
Q4B: J21.1 Q8.1(GATE) R173.1
Q4C: J22.1 Q12.1(GATE) R175.1
QA_N: J7.2 J14.2 Q3.3 Q4.3 R171.2 R172.2
QB_N: J18.2 J21.2 Q7.3 Q8.3 R173.2 R174.2
QC_N: J19.2 J22.2 Q11.3 Q12.3 R175.2 R176.2
RDY: J5.79 J23.12 J24.12 J25.12 R167.1
RST: J5.81 J23.14 J24.14 J25.14
RY_A: J5.86 R197.2
RY_B: J5.88 R198.2
RY_C: J5.90 R199.2
RY_N: J5.92 R200.2
SD_CLKI: R34.2 R36.2 R163.2 R164.2 R165.2 U1.7 U5.7 U8.7
SD_DATA_IG_A: J5.99 R146.1
SD_DATA_IG_B: J5.103 R149.1
SD_DATA_IG_C: J5.107 R152.1
TEMP_A: C39.2 J5.12 R52.1 R58.1
TEMP_AMB: C52.2 J5.20 R93.1
TEMP_B: C42.2 J5.14 R62.1 R65.1
TEMP_C: C50.2 J5.18 R77.1 R92.1
VA_N: C84.1 R94.2 R98.1 U19.2
VA_P: R103.1 R104.1 U19.3
VB_N: C86.1 R105.2 R109.1 U19.6
VB_P: R115.1 R116.1 U19.5
VC_N: C88.1 R117.2 R121.1 U19.9
VC_P: R126.1 R127.1 U19.10
VDC_SEN: J5.42 J38.2
VG_SEN_A: C51.2 J5.15 R46.1
VG_SEN_B: C54.2 J5.31 R71.1
VG_SEN_C: C55.2 J5.28 R84.1
VMID_SEN_C: C134.2 R136.1
VSEN_A: C8.1 L1.2 L2.1 R95.2
VSEN_B: C9.1 L3.2 L4.1 R106.2
VSEN_C: C10.1 L5.2 L6.1 R118.2
N13935824: C8.2 R16.2
N13935828: C9.2 R17.2
N13935832: C10.2 R18.2
N13938639: D3.2 K1.4 Q15.2 Q15.4
N13938962: Q15.1 R197.1 R201.2
N13942026: D6.2 K2.4 Q16.2 Q16.4
N13942078: Q16.1 R198.1 R204.2
N13942443: D7.2 K3.4 Q17.2 Q17.4
N13942499: Q17.1 R199.1 R202.2
N13942871: D8.2 K4.4 Q18.2 Q18.4
N13942927: Q18.1 R200.1 R203.2
N13948212: C20.1 C21.1 L8.2 U1.8(DVDD)
N13948455: R146.2 U1.6
N13948983: C78.1 D12.2 D13.1 R145.1 U1.2
N13948987: C78.2 D12.1 D13.2 R147.1 U1.3
N13950283: C29.1 C30.1 L13.2 U5.8(DVDD)
N13950343: R149.2 U5.6
N13950471: C80.1 D14.2 D15.1 R148.1 U5.2
N13950475: C80.2 D14.1 D15.2 R150.1 U5.3
N13951233: C14.1 C15.1 L7.2 U8.8(DVDD)
N13951293: R152.2 U8.6
N13951421: C82.1 D16.2 D17.1 R151.1 U8.2
N13951425: C82.2 D16.1 D17.2 R153.1 U8.3
N13952073: C22.1 C23.1 L9.2 U3.14
N13953647: R19.2 U3.11(VREF)
N13953654: R20.2 U3.12
N13953786: C77.2 R26.1 R28.2 U9.1
N13955752: R21.2 U4.11(VREF)
N13955776: R22.2 U4.12
N13955848: C79.2 R25.1 R27.2 U9.7
N13956128: C24.1 C25.1 L10.2 U4.14
N13956997: R23.2 U6.11(VREF)
N13957021: R24.2 U6.12
N13957093: C81.2 R31.1 R40.2 U9.8
N13957373: C31.1 C32.1 L14.2 U6.14
N13961403: C132.2 R128.2 R130.1 U9.12
N13961574: R129.2 U9.13 U9.14(OUT)
N13962517: R95.1 R96.2
N13962521: R96.1 R97.2
N13962525: R97.1 R98.2
N13962529: R100.1 R101.2
N13962533: R101.1 R102.2
N13962537: R102.1 R103.2
N13962920: C84.2 R94.1 R99.2 U19.1
N13966303: R106.1 R107.2
N13966307: R107.1 R108.2
N13966311: R108.1 R109.2
N13966315: R112.1 R113.2
N13966319: R113.1 R114.2
N13966323: R114.1 R115.2
N13966367: C86.2 R105.1 R111.2 U19.7
N13967295: R118.1 R119.2
N13967299: R119.1 R120.2
N13967303: R120.1 R121.2
N13967307: R123.1 R124.2
N13967311: R124.1 R125.2
N13967315: R125.1 R126.2
N13967359: C88.2 R117.1 R122.2 U19.8
N13968711: R140.2 U19.13 U19.14(OUT)
N13968894: C69.2 R139.2 R141.1 U19.12
N13971097: R80.1 R81.2
N13971101: R81.1 R82.2
N13971105: R82.1 R83.2
N13971109: R85.1 R86.2
N13971113: R86.1 R87.2
N13971117: R87.1 R88.2
N13971145: C87.2 R79.1 R84.2 U18.8
N13971857: R42.1 R43.2
N13971861: R43.1 R44.2
N13971865: R44.1 R45.2
N13971869: R48.1 R49.2
N13971873: R49.1 R50.2
N13971877: R50.1 R51.2
N13971921: C83.2 R39.1 R46.2 U18.1
N13972313: R67.1 R68.2
N13972317: R68.1 R69.2
N13972321: R69.1 R70.2
N13972325: R73.2 R110.1
N13972329: R73.1 R74.2
N13972333: R74.1 R75.2
N13972361: C85.2 R61.1 R71.2 U18.7
N13976693: R52.2 U13.2
N13976832: J27.2 R55.2 R58.2
N13977429: R62.2 U14.2
N13977513: J29.2 R64.2 R65.2
N13977939: R77.2 U16.2
N13978023: J30.2 R91.2 R92.2
N13978475: R93.2 U17.3
N14285734: C16.1 C26.1 C33.1 R53.2 R90.1 T1.2 U2.2(VCC)
N14285754: R90.2 U2.5
N14285906: T1.1 U2.3
N14285918: T1.3 U2.1
N14286006: D9.2 T1.6
N14286010: D24.2 T1.4
N14287499: C17.1 C27.1 C34.1 R63.2 R154.1 T2.2 U7.2(VCC)
N14287503: R154.2 U7.5
N14287671: T2.1 U7.3
N14287683: T2.3 U7.1
N14287771: D11.2 T2.6
N14287775: D25.2 T2.4
N14288675: C105.1 L11.1 U10.3(OUT)
N14288687: C101.1 C103.1 L11.2 R155.2
N14288855: D26.2 R156.1
N14289456: C106.1 L12.1 U21.3(OUT)
N14289468: C102.1 C104.1 L12.2 R157.2
N14289636: D27.2 R158.1
N14292350: C107.1 C108.1 C109.1 R159.2 R160.1 T3.2 U22.2(VCC)
N14292354: R160.2 U22.5
N14292522: T3.1 U22.3
N14292534: T3.3 U22.1
N14292622: D30.2 T3.6
N14292626: D31.2 T3.4
N14292928: C116.1 L15.1 U23.3(OUT)
N14292940: C114.1 C115.1 L15.2 R161.2
N14293108: D32.2 R162.1
N14296633: D19.2 R208.1
N14311324: C61.1 C64.2 L19.2 U12.1
N14315131: R72.1 U12.4(VO ADJUST)
N14315306: D18.2 R207.1
N14319882: C38.2 U11.8(VCC)
N14320990: C19.1 L16.1 U11.1 U11.2 U11.3 U11.4 U11.5
N14321043: C19.2 U11.6
N14321188: R54.2 R57.1 U11.12
N14327656: J5.11 J6.1
